# EAGLE board CMoy-Pro-V_1_0_0_1 (EAGLE 6.4)
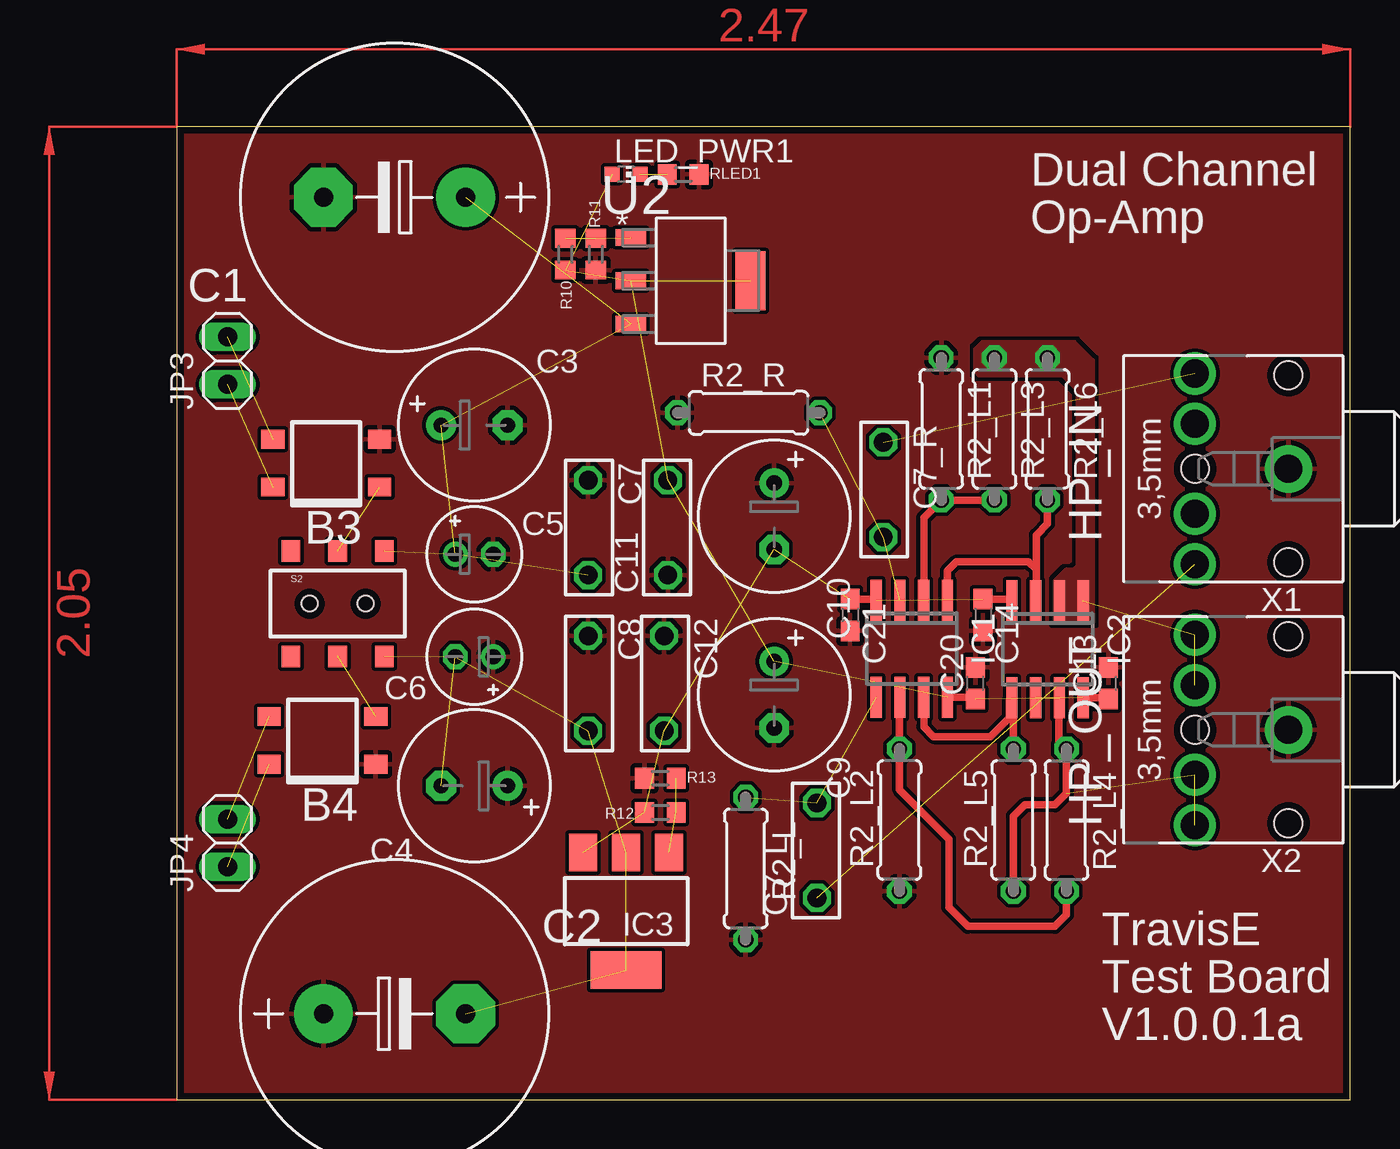
[diagram p0: board, top side]
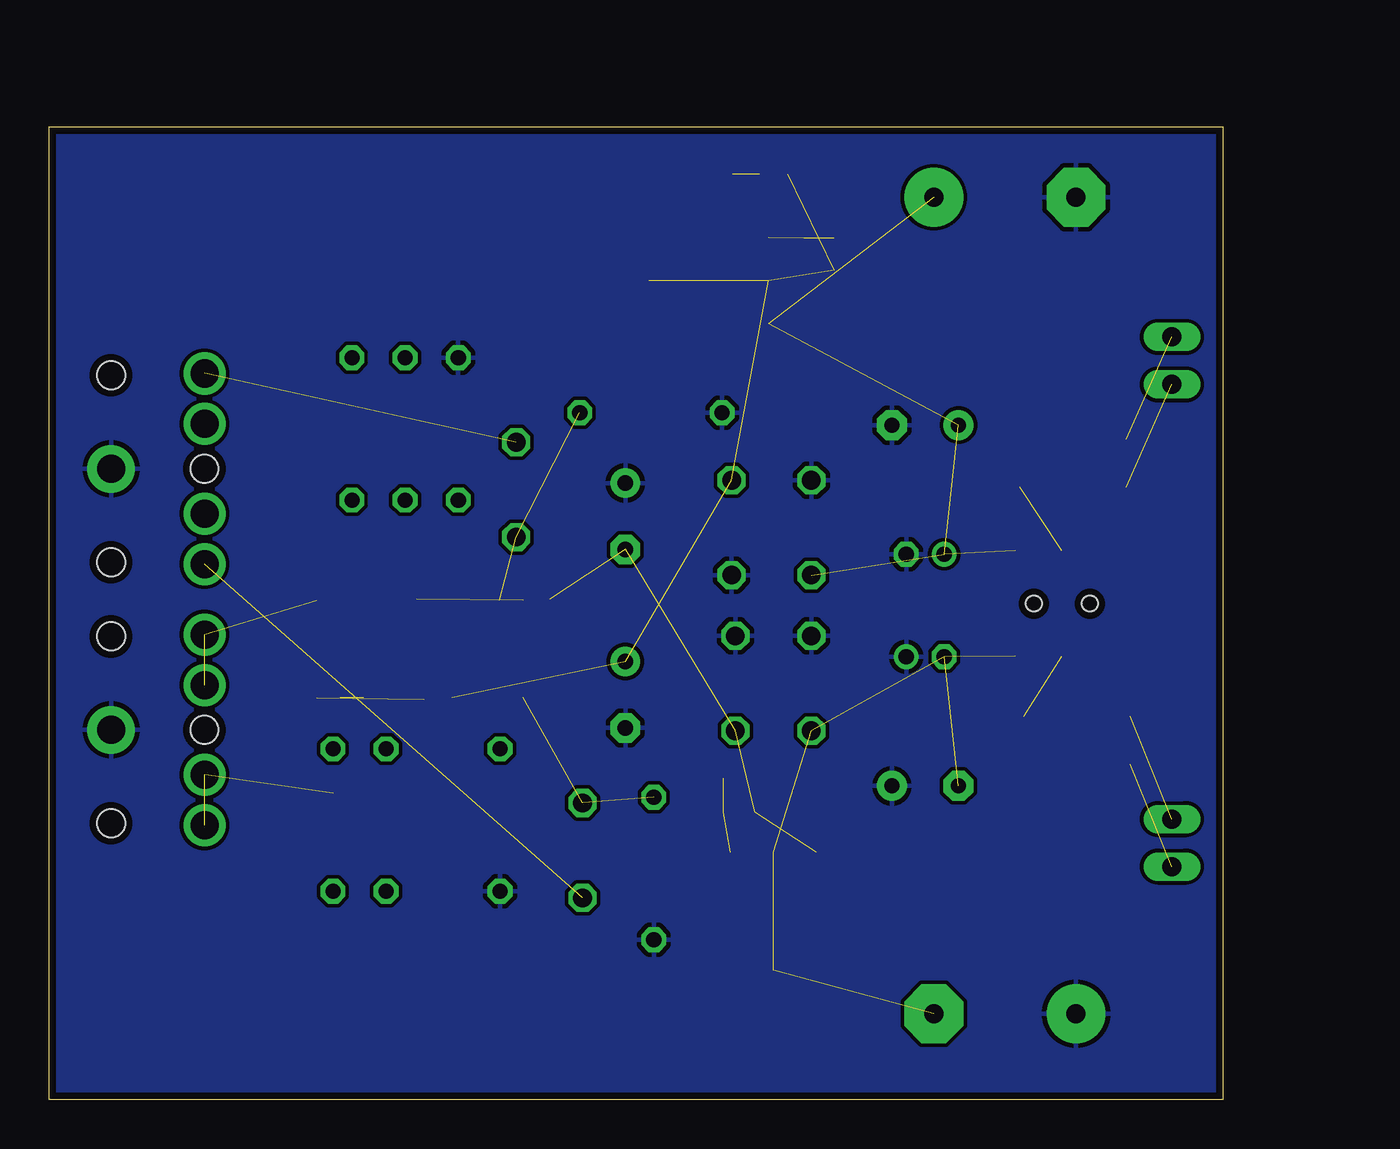
[diagram p1: board, bottom side, seen from below]

Size 62.82 x 52.07 mm. Coordinates in mm from the lower left corner, seen from the top.
Outline: 0,0 62.82,0 62.82,52.07 0,52.07 0,0
Copper layers (1*16): Top 0.035mm / dielectric 1.5mm / Bottom 0.035mm
Design rules "default *": minimum track width 10mil, minimum drill 24mil, track to track 8mil, track to pad 8mil, pad to pad 8mil, via to via 8mil, smd to smd 8mil, copper to edge 15mil, drill to drill 8mil, minimum pad ring 10mil, minimum via ring 8mil, stop-mask expansion 4mil, vias tented up to drill 0mil, thermal gap 10mil

## Footprints (pad centres in the part's own frame; a part is rotated, then mirrored left to right if it is on the bottom)
TO-269AA = smd 1 x 1.25: + -1.28,-2.855; - 1.28,-2.855; AC1 -1.28,2.855; AC2 1.28,2.855
E7,5-16 = drill 1.016 pad 3.15: + -3.81,0 | drill 1.016 pad 3.15 octagon: - 3.81,0
E3,5-8 = drill 0.813 pad 1.6: + -1.778,0 | drill 0.813 pad 1.6 octagon: - 1.778,0
E2-5 = drill 0.813 pad 1.27: + -1.016,0 | drill 0.813 pad 1.27 octagon: - 1.016,0
2,5X5,5RM5,0 = drill 1 pad 1.5 octagon: 1 -2.54,0; 2 2.54,0
C0603 = smd 1.1 x 1: 1 -0.85,0; 2 0.85,0
SO8 = smd 0.6 x 2.2: 1 -1.905,-2.6; 2 -0.635,-2.6; 3 0.635,-2.6; 4 1.905,-2.6; 5 1.905,2.6; 6 0.635,2.6; 7 -0.635,2.6; 8 -1.905,2.6
SOT-223 = smd 1.5 x 2: 1 -2.3,-3.15; 2 0,-3.15; 3 2.3,-3.15 | smd 3.8 x 2: 4 0,3.15
1X02 = drill 1.016 long: 1 -1.27,0; 2 1.27,0
CHIP-LED0603 = smd 0.8 x 0.8: A 0,-0.75; C 0,0.75
0207/7 = drill 0.813 octagon: 1 -3.81,0; 2 3.81,0
R0603 = smd 1 x 1.1: 1 -0.85,0; 2 0.85,0
AYZ0202 = smd 1 x 1.15: 1 -2.5,2.825; 2 0,2.825; 3 2.5,2.825; 4 -2.5,-2.825; 5 0,-2.825; 6 2.5,-2.825 | hole 0.85: 1.5,0; -1.5,0
SOT230P700X180-4N = smd 1.626 x 0.889: 1 -3.2,2.311; 2 -3.2,0; 3 -3.2,-2.311 | smd 1.626 x 3.175: 4 3.2,0
STX3100 = drill 1.5 pad 2.54: 1 2.7,-0.1 | drill 1.5: 2 7.7,5; 3 7.7,2.3; 4 7.7,-2.5; 5 7.7,-5.2 | hole 1.5: 2.7,4.9; 2.7,-5.1; 7.7,-0.1

## Placement (x,y rotation side)
B3  RECTIFIER-S40  [TO-269AA]  8,34.06 90 top
B4  RECTIFIER-S40  [TO-269AA]  7.8,19.23 90 top
C1  4700u  [E7,5-16]  11.66,48.29 180 top
C2  4700u  [E7,5-16]  11.66,4.6 0 top
C3  470u  [E3,5-8]  15.93,36.09 0 top
C4  470u  [E3,5-8]  15.93,16.79 180 top
C5  10u  [E2-5]  15.93,29.18 0 top
C6  10u  [E2-5]  15.93,23.7 180 top
C7  1,0NF100VMKS22  [2,5X5,5RM5,0]  22.02,30.61 270 top
C7_L  1uF  [2,5X5,5RM5,0]  34.26,13.34 90 top
C7_R  1uF  [2,5X5,5RM5,0]  37.82,32.64 270 top
C8  1,0NF100VMKS22  [2,5X5,5RM5,0]  22.02,22.28 270 top
C9  470u  [E3,5-8]  31.98,21.67 270 top
C10  470u  [E3,5-8]  31.98,31.22 270 top
C11  1,0NF100VMKS22  [2,5X5,5RM5,0]  26.29,30.61 90 top
C12  1,0NF100VMKS22  [2,5X5,5RM5,0]  26.09,22.28 270 top
C13  100n  [C0603]  49.86,22.28 90 top
C14  100n  [C0603]  43.15,25.93 270 top
C20  100n  [C0603]  42.75,22.28 90 top
C21  100n  [C0603]  36.04,25.93 270 top
IC1  AD8620R  [SO8]  39.34,24.13 180 top
IC2  AD8620R  [SO8]  46.61,24.1 180 top
IC3  LM337IMP  [SOT-223]  24.05,10.08 180 top
JP3  [1X02]  2.72,39.55 90 top
JP4  [1X02]  2.72,13.74 90 top
LED_PWR1  [CHIP-LED0603]  24.05,49.5 270 top
R2_L  10K  [0207/7]  30.45,12.37 270 top
R2_L1  10K  [0207/7]  40.92,35.89 270 top
R2_L2  10K  [0207/7]  38.68,14.96 90 top
R2_L3  10K  [0207/7]  43.76,35.89 270 top
R2_L4  10K  [0207/7]  47.63,14.96 270 top
R2_L5  10  [0207/7]  44.78,14.96 90 top
R2_L6  10  [0207/7]  46.61,35.89 270 top
R2_R  10K  [0207/7]  30.61,36.75 0 top
R10  200  [R0603]  20.8,45.24 270 top
R11  2200  [R0603]  22.43,45.24 90 top
R12  200  [R0603]  25.88,15.37 180 top
R13  2200  [R0603]  25.88,17.2 0 top
RLED1  10K  [R0603]  27.1,49.5 0 top
S2  SWITCH-DPDTSMD  [AYZ0202]  8.61,26.54 0 top
U2  LM317MDCY  [SOT230P700X180-4N]  27.51,43.81 0 top
X1  STEREOJACK  [STX3100]  62.2,33.66 180 top
X2  STEREOJACK  [STX3100]  62.2,19.69 180 top

## Library data of the parts
B3 B4 = rectifier
C1-C6 C9 C10 C13 C14 C20 C21 R2_L R2_L1-R2_L6 R2_R R10-R13 RLED1 = rcl
C7 C7_L C7_R C8 C11 C12 = wima_c
IC1 IC2 = analog-devices; MF: ALTERA CORPORATION; MPN: AD8620ARZ; OC_FARNELL: 9994386; OC_NEWARK: 59K6972
IC3 = AWJLEagleLib
JP3 JP4 = pinhead
LED_PWR1 X1 X2 = adafruit
S2 = SparkFun
U2 = Texas Instruments_By_element14_Batch_1; MPN: LM317MDCY; OC_FARNELL: 1648658; OC_NEWARK: 75C0818; PACKAGE: SOT-223-3; SUPPLIER: TEXAS INSTRUMENTS

## Nets
GND: B3.- B4.+ C1.- C2.+ C3.- C4.+ C5.- C6.+ C7.1 C8.1 C9.- C10.+ C11.1 C12.1 C13.2 C14.2 C20.2 C21.2 R2_L1.1 R2_L2.1 R2_L.2 R2_R.1 R11.1 R13.1 RLED1.2 X1.1 X2.1
IN_R: C7_R.2 IC1.3 R2_R.2
N$1: C7_L.2 IC1.5 R2_L.1
N$2: LED_PWR1.C RLED1.1
N$3: IC3.1 R12.1 R13.2
N$4: C7_L.1 X1.2
N$5: IC2.1 IC2.2 R2_L3.1 R2_L6.1 X2.4 X2.5
N$6: IC1.2 R2_L1.2 R2_L3.2
N$7: C7_R.1 X1.5
N$8: B3.+ S2.2
N$9: R10.1 R11.2 U2.1
N$11: B4.- S2.5
N$12: IC1.6 R2_L2.2 R2_L4.2
N$13: B4.AC1 JP4.1
N$14: B3.AC2 JP3.2
N$15: C1.+ C3.+ C5.+ C7.2 S2.3 U2.3
N$16: B3.AC1 JP3.1
N$17: B4.AC2 JP4.2
N$18: C2.- C4.- C6.- C8.2 IC3.2 IC3.4 S2.6
N$19: IC1.1 IC2.3 R2_L6.2
N$20: IC1.7 IC2.5 R2_L5.2
N$21: IC2.6 IC2.7 R2_L4.1 R2_L5.1 X2.2 X2.3
V+: C9.+ C11.2 C13.1 C20.1 IC1.8 IC2.8 LED_PWR1.A R10.2 U2.2 U2.4
V-: C10.- C12.2 C14.1 C21.1 IC1.4 IC2.4 IC3.3 R12.2

## Tracks (layer width: path | path; a pad name or v marks a point on that pad's centre or on a via)
GND
  pour Top (rank 6): 0.28,51.74 62.46,51.74 62.46,0.33 0.28,0.33
  pour Bottom (rank 6): 0.28,51.74 62.46,51.74 62.46,0.33 0.28,0.33
IN_R  (2 unrouted)
N$1  (2 unrouted)
N$2  (1 unrouted)
N$3  (2 unrouted)
N$4  (1 unrouted)
N$5  (2 unrouted)
  pour Top (rank 5, no thermals): 47.02,25.53 47.02,27.76 47.63,28.37 48.03,28.37 48.23,28.58 48.23,37.92 47.42,38.73 42.95,38.73 42.75,38.94 42.75,40.16 43.15,40.56 48.03,40.56 49.05,39.55 49.05,25.53
N$6
  Top 0.406: IC1.2 39.98,31.14 R2_L1.2 R2_L3.2
N$7  (1 unrouted)
N$8  (1 unrouted)
N$9  (2 unrouted)
N$11  (1 unrouted)
N$12
  Top 0.406: IC1.6 38.68,21.51 R2_L2.2 38.68,16.59 41.33,13.95 41.33,10.29 42.34,9.27 47.02,9.27 47.62,9.88 R2_L4.2
N$13  (1 unrouted)
N$14  (1 unrouted)
N$15  (5 unrouted)
N$16  (1 unrouted)
N$17  (1 unrouted)
N$18  (6 unrouted)
N$19
  Top 0.406: IC1.1 41.25,28.3 41.73,28.78 45.59,28.78 46,28.37 | 46,28.37 46,26.73 IC2.3 | R2_L6.2 46.61,30.81 46,30.2 46,28.37
N$20
  Top 0.406: IC1.7 39.98,19.96 40.51,19.43 43.56,19.43 44.58,20.45 44.58,21.38 IC2.5 44.78,21.43 R2_L5.2
N$21  (3 unrouted)
  Top 0.406: IC2.7 47.24,21.08 47.22,21.06 47.22,19.18 R2_L4.1 47.62,16.38 47.02,15.77 45.39,15.77 44.78,15.16 R2_L5.1
V+  (7 unrouted)
  Top 0.406: IC2.8 49.78,21.51 C13.1 | IC1.8 42.64,21.53 C20.1
V-  (5 unrouted)
  Top 0.406: C14.1 44.63,26.78 IC2.4 | C21.1 37.39,26.78 IC1.4
(copper drawn outside any net)
  shapes: Top area x2

## Text on the board
tPlace: Dual Channel | Op-Amp | HP_IN | HP_OUT | TravisE | Test Board | V1.0.0.1a